# Altium PCB АСТА.758725.047_V2.PcbDoc (part 1 of 3)
Units mm, origin at the board's own origin, x right, y up, seen from the top; angles counter-clockwise.
Board outline 310 x 80 mm, 2 copper layers (Top Layer, Top, Bottom Layer, Bottom); 261 components, 259 nets, 994 pads, 414 vias.
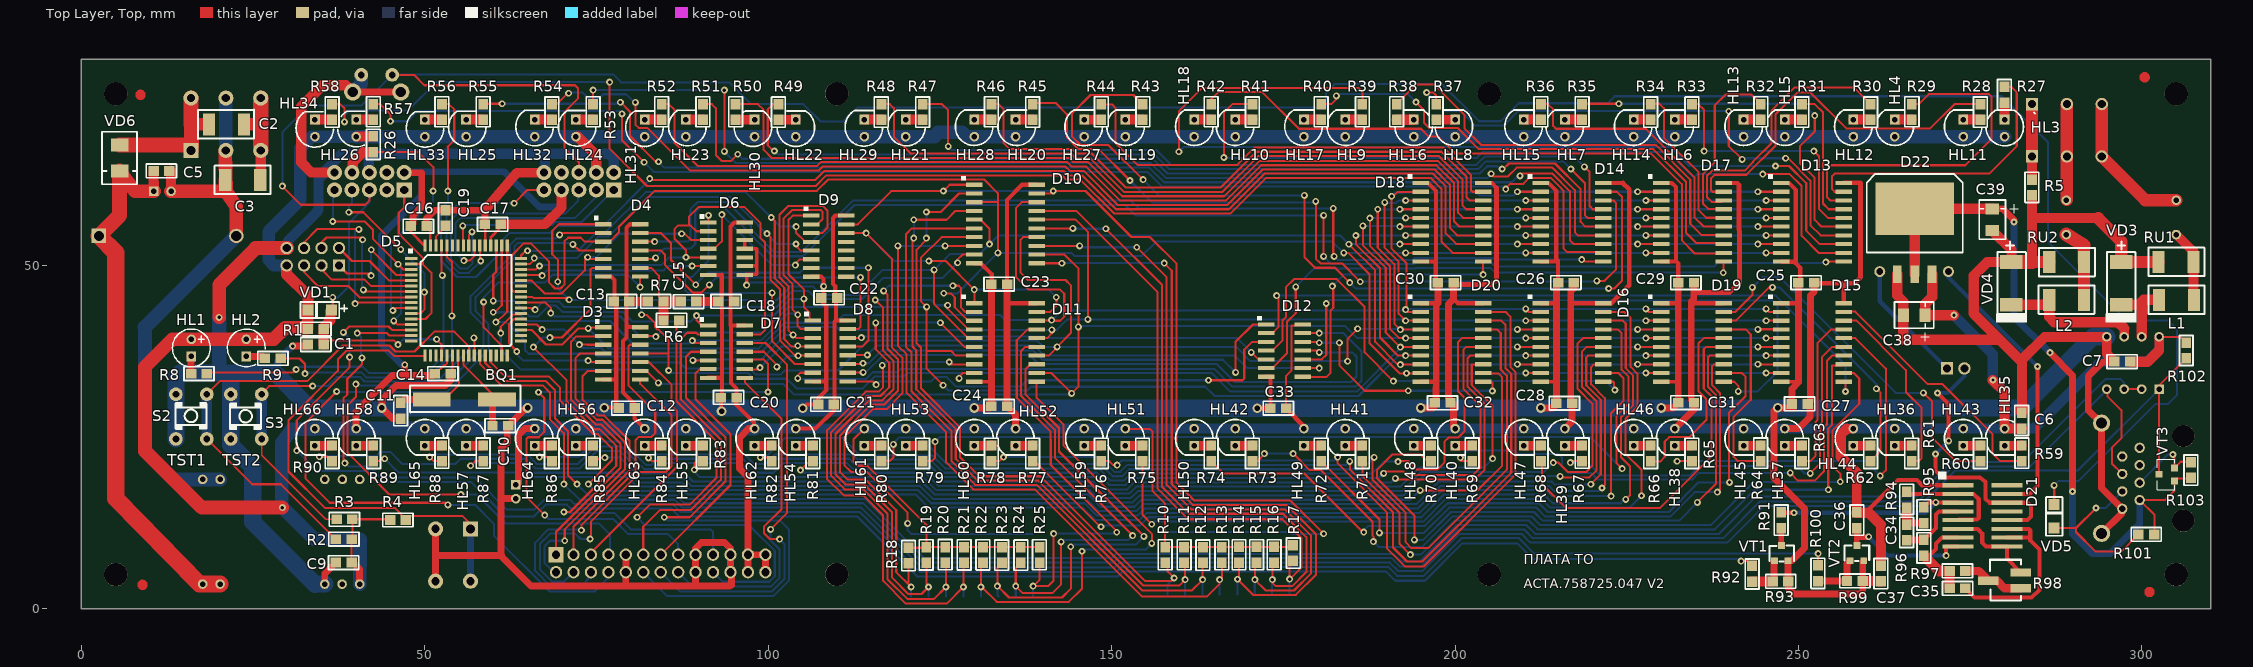
[diagram p0: Top Layer, Top view]
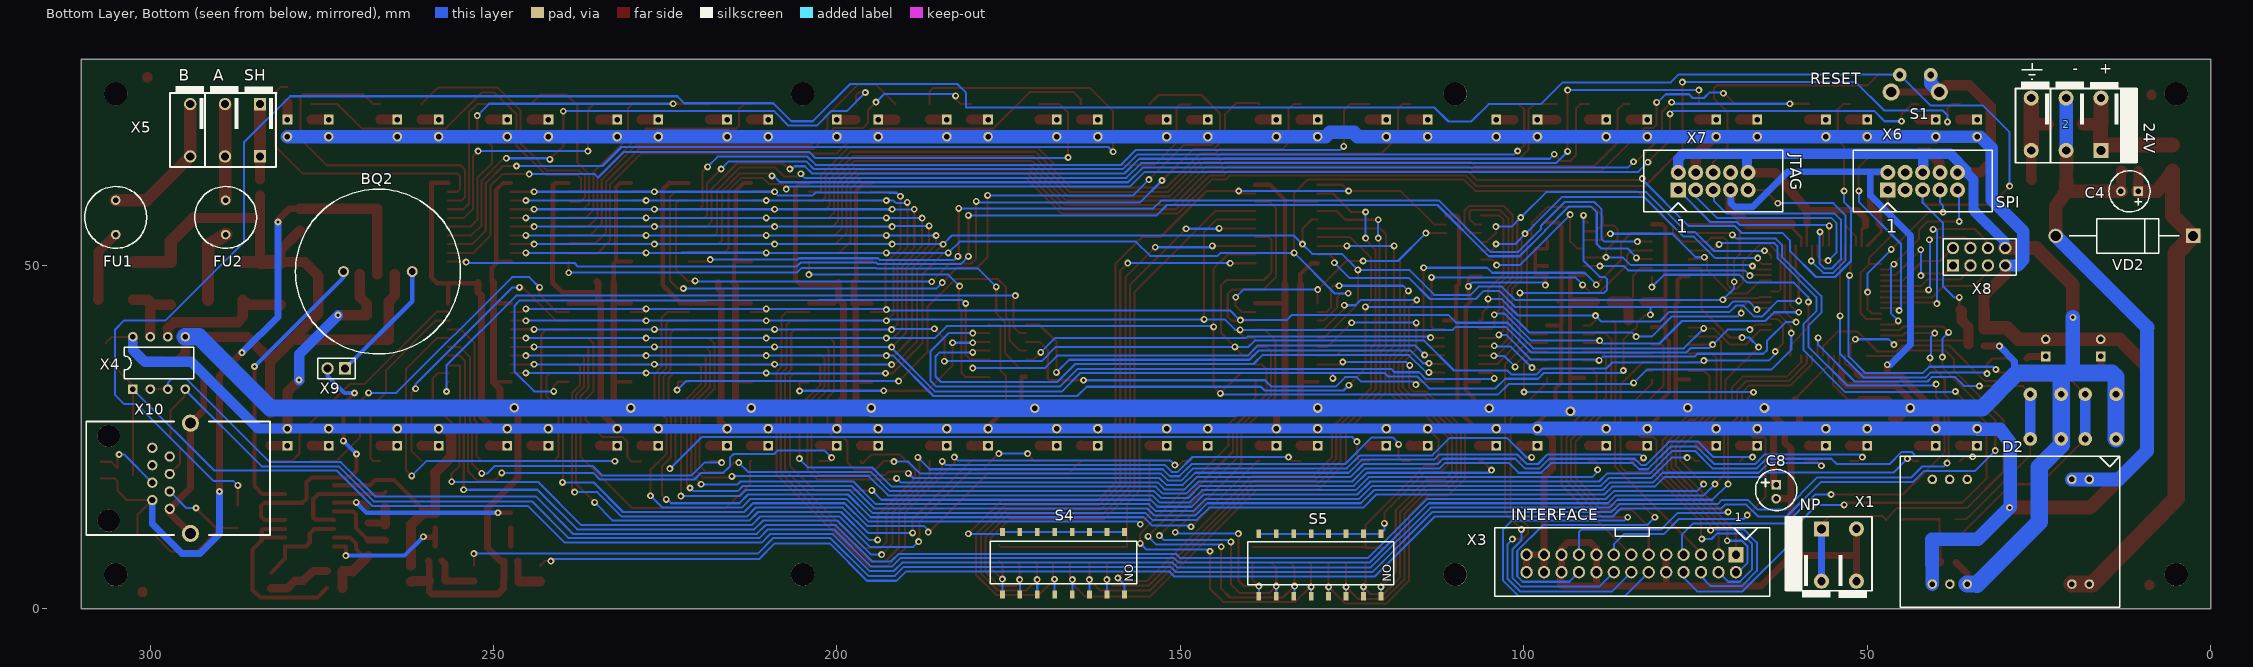
[diagram p1: Bottom Layer, Bottom view, seen from below]

## Layer stack, top to bottom
Top Solder, Top Mask: solder mask 0.0102, Solder Resist, Dk 3.5
Top Layer, Top: signal copper 0.0356
Dielectric 1: dielectric 0.32, FR-4, Dk 4.8
Bottom Layer, Bottom: signal copper 0.0356
Bottom Solder, Bot Mask: solder mask 0.0102, Solder Resist, Dk 3.5

## Board outline
0,0 310,0 310,80 0,80

## Design rules (kind name [scope] priority, off if disabled: settings)
Clearance [All] p1: gap=0.254 ignorepadtopadclearanceinfootprint=FALSE except(0: Arc-Hole Track-Hole SMDPad-Hole THPad-Hole Via-Hole Fill-Hole Poly-Hole Region-Hole Text-Hole; 0.305: Arc-Arc Arc-Track Arc-THPad Arc-Via Track-Track Track-THPad Track-Via THPad-THPad THPad-Via Via-Via)
HoleSize [All] p1: absolutevalues=TRUE maxlimit=6 minlimit=0.3 maxpercent=80.000 minpercent=20.000
MinimumSolderMaskSliver [All] p1: minsoldermaskwidth=0.1
PlaneClearance [All] p1: clearance=0.4
PolygonConnect [All] p1: connectstyle=Relief reliefconductorwidth=0.254 reliefentries=4 polygonreliefangle="90 Angle" airgapwidth=0.254
RoutingCorners [All] p1: cornerstyle=45-Degree minsetback=2.5 maxsetback=2.5
RoutingVias [All] p1: holewidth=0.5 width=1 viastyle="Through Hole" minholewidth=0.4 minwidth=0.8 maxholewidth=0.8 maxwidth=1.6
SilkToSilkClearance [All] p1: silktosilkclearance=0.05
SilkToSolderMaskClearance [IsPad] p1: minsilkscreentomaskgap=0.05 clearancetoexposedcopper=TRUE
SolderMaskExpansion SolderMaskExpansion_1 [isVia] p1: expansion=-0.5
SolderMaskExpansion [All] p2: expansion=0.2
Width [All] p1: maxlimit=4 minlimit=0.2 preferedwidth=0.5
24 further rules are at their usual default settings.

## Components (designator, comment, footprint, x,y, rotation, side; value= is the part's Value field where it differs from the comment)
2 "{Value}" DG142V_03_ПРЯМАЯ 15.95,66.75 r0 bottom
BQ1 "" HC49 60.5,30.5 r180 top
BQ2 "" KPE112 261.836,49.111 r0 bottom
C1 "" 0805 35.25,38.5 r180 top
C2 "" 1812 23.65,70.55 r180 top
C3 "" 1812 20.95,62.45 r0 top
C4 "" CE-H2.5_D6_D0.8 10.55,60.8 r0 bottom
C5 "" 0805 10.5,63.75 r0 top
C6 "" 0805 282.5,26.25 r90 top
C7 "" 0805 296,36 r0 top
C8 "" CE-H2_D6_D0.8 63.25,18.05 r270 bottom
C9 "" 0805 37.05,6.75 r0 top
C10 "" 0805 59.85,26.65 r0 top
C11 "" 0805 46.5,30 r270 top
C12 "" 0805 78.25,29.25 r0 top
C13 "" 0805 77.5,44.75 r0 top
C14 "" 0805 53.75,34.25 r180 top
C15 "" 0805 87.25,44.75 r0 top
C16 "" 0805 50.25,55.75 r180 top
C17 "" 0805 58.75,56 r0 top
C18 "" 0805 92.75,44.75 r0 top
C19 "" 0805 53,55.75 r90 top
C20 "" 0805 93.1,30.75 r0 top
C21 "" 0805 107.25,29.75 r0 top
C22 "" 0805 107.75,45.25 r0 top
C23 "" 0805 132.5,47.25 r0 top
C24 "" 0805 132.5,29.5 r0 top
C25 "" 0805 250,47.5 r0 top
C26 "" 0805 215,47.5 r0 top
C27 "" 0805 249.05,29.85 r0 top
C28 "" 0805 214.75,29.95 r0 top
C29 "" 0805 232.5,47.5 r0 top
C30 "" 0805 197.5,47.5 r0 top
C31 "" 0805 232.5,30 r0 top
C32 "" 0805 197.05,30 r0 top
C33 "" 0805 173.117,29.221 r0 top
C34 "" 0805 265.75,12.25 r270 top
C35 "" 0805 272,3 r0 top
C36 "" 0805 258.5,11.75 r90 top
C37 "" 0805 262,4 r90 top
C38 "10 uF 6.3 V" SIZE_A_1206 265.265,42.761 r180 top
C39 "10 uF 6.3 V" SIZE_A_1206 278.219,55.08 r270 top
D2 "" AM4T_AM4T(Primary) 17.65,18.85 r0 bottom
D3 "" SO14 76,41 r270 top
D4 "" SO14 76,56 r270 top
D5 "" QFP14X14-64 48,51 r0 top
D6 "" SO14 91.25,56.25 r270 top
D7 "" SO14 91.25,41.25 r270 top
D8 "" SO16 106.5,42 r270 top
D9 "" SO16 106.25,57.25 r270 top
D10 "" SO20W 130,61.75 r270 top
D11 "" SO20W 130,44.5 r270 top
D12 "" SO14 172.482,41.413 r270 top
D13 "" SO20W 247.5,62 r270 top
D14 "" SO20W 212.5,62 r270 top
D15 "" SO20W 247.5,44.5 r270 top
D16 "" SO20W 212.5,44.5 r270 top
D17 "" SO20W 230,62 r270 top
D18 "" SO20W 195,62 r270 top
D19 "" SO20W 230,44.5 r270 top
D20 "" SO20W 195,44.5 r270 top
D21 "" SO16+W 272.25,18 r270 top
D22 "LM1086" TO-263 264.376,48.73 r270 top
FU1 "" FUSE 305,59.5 r270 bottom
FU2 "" FUSE 289,59.5 r270 bottom
HL1 "" HL_1 16,38 r180 top
HL2 "" HL_1 24,38 r180 top
HL3 "" HL_1 280,70 r0 top
HL4 "" HL_1 264,70 r0 top
HL5 "" HL_1 248,70 r0 top
HL6 "" HL_1 232,70 r0 top
HL7 "" HL_1 216,70 r0 top
HL8 "" HL_1 200,70 r0 top
HL9 "" HL_1 184,70 r0 top
HL10 "" HL_1 168,70 r0 top
HL11 "" HL_1 274,70 r0 top
HL12 "" HL_1 258,70 r0 top
HL13 "" HL_1 242,70 r0 top
HL14 "" HL_1 226,70 r0 top
HL15 "" HL_1 210,70 r0 top
HL16 "" HL_1 194,70 r0 top
HL17 "" HL_1 178,70 r0 top
HL18 "" HL_1 162,70 r0 top
HL19 "" HL_1 152,70 r0 top
HL20 "" HL_1 136,70 r0 top
HL21 "" HL_1 120,70 r0 top
HL22 "" HL_1 104,70 r0 top
HL23 "" HL_1 88,70 r0 top
HL24 "" HL_1 72,70 r0 top
HL25 "" HL_1 56,70 r0 top
HL26 "" HL_1 40,70 r0 top
HL27 "" HL_1 146,70 r0 top
HL28 "" HL_1 130,70 r0 top
HL29 "" HL_1 114,70 r0 top
HL30 "" HL_1 98,70 r0 top
HL31 "" HL_1 82,70 r0 top
HL32 "" HL_1 66,70 r0 top
HL33 "" HL_1 50,70 r0 top
HL34 "" HL_1 34,70 r0 top
HL35 "" HL_1 280,25 r180 top
HL36 "" HL_1 264,25 r180 top
HL37 "" HL_1 248,25 r180 top
HL38 "" HL_1 232,25 r180 top
HL39 "" HL_1 216,25 r180 top
HL40 "" HL_1 200,25 r180 top
HL41 "" HL_1 184,25 r180 top
HL42 "" HL_1 168,25 r180 top
HL43 "" HL_1 274,25 r180 top
HL44 "" HL_1 258,25 r180 top
HL45 "" HL_1 242,25 r180 top
HL46 "" HL_1 226,25 r180 top
HL47 "" HL_1 210,25 r180 top
HL48 "" HL_1 194,25 r180 top
HL49 "" HL_1 178,25 r180 top
HL50 "" HL_1 162,25 r180 top
HL51 "" HL_1 152,25 r180 top
HL52 "" HL_1 136,25 r180 top
HL53 "" HL_1 120,25 r180 top
HL54 "" HL_1 104,25 r180 top
HL55 "" HL_1 88,25 r180 top
HL56 "" HL_1 72,25 r180 top
HL57 "" HL_1 56,25 r180 top
HL58 "" HL_1 40,25 r180 top
HL59 "" HL_1 146,25 r180 top
HL60 "" HL_1 130,25 r180 top
HL61 "" HL_1 114,25 r180 top
HL62 "" HL_1 98,25 r180 top
HL63 "" HL_1 82,25 r180 top
HL64 "" HL_1 66,25 r180 top
HL65 "" HL_1 50,25 r180 top
HL66 "" HL_1 34,25 r180 top
L1 "" 1812 302.5,45 r0 top
L2 "" 1812 286.5,45 r0 top
R1 "" 0805 35.25,40.75 r180 top
R2 "" 0805 37.05,10.15 r0 top
R3 "" 0805 37.15,13.05 r0 top
R4 "" 0805 44.95,12.95 r0 top
R5 "" 0805 284,62.5 r270 top
R6 "" 0805 84.75,42 r0 top
R7 "" 0805 84.75,44.75 r180 top
R8 "" 0805 18.25,34.25 r180 top
R9 "" 0805 29,36.5 r180 top
R10 "" 0805 157.795,6.718 r90 top
R11 "" 0805 160.545,6.718 r90 top
R12 "" 0805 163.295,6.718 r90 top
R13 "" 0805 166.045,6.718 r90 top
R14 "" 0805 168.545,6.742 r90 top
R15 "" 0805 171.085,6.742 r90 top
R16 "" 0805 173.625,6.742 r90 top
R17 "" 0805 176.419,6.996 r90 top
R18 "" 0805 120.412,6.615 r90 top
R19 "" 0805 123.016,6.718 r90 top
R20 "" 0805 125.766,6.718 r90 top
R21 "" 0805 128.516,6.718 r90 top
R22 "" 0805 131.266,6.718 r90 top
R23 "" 0805 134.016,6.718 r90 top
R24 "" 0805 136.766,6.718 r90 top
R25 "" 0805 139.516,6.718 r90 top
R26 "" 0805 42.5,66.5 r90 top
R27 "" 0805 280,76 r270 top
R28 "" 0805 276.5,73.5 r270 top
R29 "" 0805 266.5,73.5 r270 top
R30 "" 0805 260.5,73.5 r270 top
R31 "" 0805 250.5,73.5 r270 top
R32 "" 0805 244.5,73.5 r270 top
R33 "" 0805 234.5,73.5 r270 top
R34 "" 0805 228.5,73.5 r270 top
R35 "" 0805 218.5,73.5 r270 top
R36 "" 0805 212.5,73.5 r270 top
R37 "" 0805 197.25,73.5 r270 top
R38 "" 0805 191.5,73.5 r270 top
R39 "" 0805 186.5,73.5 r270 top
R40 "" 0805 180.5,73.5 r270 top
R41 "" 0805 170.5,73.5 r270 top
R42 "" 0805 164.5,73.5 r270 top
R43 "" 0805 154.5,73.5 r270 top
R44 "" 0805 148.5,73.5 r270 top
R45 "" 0805 138.5,73.5 r270 top
R46 "" 0805 132.5,73.5 r270 top
R47 "" 0805 122.5,73.5 r270 top
R48 "" 0805 116.5,73.5 r270 top
R49 "" 0805 101.5,73.5 r270 top
R50 "" 0805 95.25,73.5 r270 top
R51 "" 0805 90.5,73.5 r270 top
R52 "" 0805 84.5,73.5 r270 top
R53 "" 0805 74.5,73.5 r270 top
R54 "" 0805 68.5,73.5 r270 top
R55 "" 0805 58.5,73.5 r270 top
R56 "" 0805 52.5,73.5 r270 top
R57 "" 0805 42.5,73.5 r270 top
R58 "" 0805 36.5,73.5 r270 top
R59 "" 0805 282.5,21.5 r90 top
R60 "" 0805 276.5,21.5 r90 top
R61 "" 0805 266.5,21.5 r90 top
R62 "" 0805 260.5,21.5 r90 top
R63 "" 0805 250.5,21.5 r90 top
R64 "" 0805 244.5,21.5 r90 top
R65 "" 0805 234.5,21.5 r90 top
R66 "" 0805 228.5,21.5 r90 top
R67 "" 0805 218.5,21.5 r90 top
R68 "" 0805 212.5,21.5 r90 top
R69 "" 0805 202.5,21.5 r90 top
R70 "" 0805 196.5,21.5 r90 top
R71 "" 0805 186.5,21.5 r90 top
R72 "" 0805 180.5,21.5 r90 top
R73 "" 0805 170.5,21.5 r90 top
R74 "" 0805 164.5,21.5 r90 top
R75 "" 0805 154.5,21.5 r90 top
R76 "" 0805 148.5,21.5 r90 top
R77 "" 0805 138.5,21.5 r90 top
R78 "" 0805 132.5,21.5 r90 top
R79 "" 0805 122.5,21.5 r90 top
R80 "" 0805 116.5,21.5 r90 top
R81 "" 0805 106.5,21.5 r90 top
R82 "" 0805 100.5,21.5 r90 top
R83 "" 0805 90.5,21.5 r90 top
R84 "" 0805 84.5,21.5 r90 top
R85 "" 0805 74.5,21.5 r90 top
R86 "" 0805 68.5,21.5 r90 top
R87 "" 0805 58.5,21.5 r90 top
R88 "" 0805 52.5,21.5 r90 top
R89 "" 0805 42.5,21.5 r90 top
R90 "" 0805 36.5,21.5 r90 top
R91 "" 0805 247.5,11.75 r90 top
R92 "" 0805 243.25,6.25 r270 top
R93 "" 0805 246.25,4 r0 top
R94 "" 0805 265.75,14.75 r90 top
R95 "" 0805 268.25,12.5 r90 top
R96 "" 0805 268.25,7.75 r90 top
R97 "" 0805 272,5.5 r0 top
R98 "" PVG3G 282.25,3 r90 top
R99 "" 0805 259.35,4.05 r180 top
R100 "" 0805 252.85,4.05 r90 top
R101 "51k" 0805 301.766,10.849 r180 top
R102 "51k" 0805 306.448,38.749 r270 top
R103 "51k" 0805 307.14,19.087 r90 top
RU1 "" 1812 307.5,50.5 r180 top
RU2 "" 1812 286.5,50.5 r0 top
S1 "" S07XX 43,77 r0 bottom
S2 "" S06XX 16,28 r90 top
S3 "" S06XX 24,28 r90 top
S4 "" DM8 158.131,11.187 r0 bottom
S5 "" DM8 120.793,10.933 r0 bottom
VD1 "" 1206 33,43.5 r0 top
VD2 "" VD-H20_D5_D1.5 2.55,54.3 r0 bottom
VD3 "" SMC 297,50.5 r270 top
VD4 "" SMC 281,50.5 r270 top
VD5 "" 1206 287.213,15.184 r270 top
VD6 "10BQ060" SMB 5.55,67.55 r180 top
VT1 "" SOT23#1 246.5,7 r0 top
VT2 "" SOT23#1 257.5,7 r0 top
VT3 "27002" SOT23#2 304.762,18.631 r90 top
X1 "{Value}" DG142V_02_ПРЯМАЯ 56.65,11.65 r180 bottom
X3 "" BH26 69.104,7.885 r0 bottom
X4 "" DIP8 302.5,32 r180 bottom
X5 "" DG142V-03_01 284,73.5 r0 bottom
X6 "" BH10 47,61 r180 bottom
X7 "" BH10 77.5,61 r180 bottom
X8 "" PLD8 37.5,50 r180 bottom
X9 "" PLS2 271.615,35.014 r0 bottom
X10 "XPort" XPORT 297.142,14.567 r180 bottom

## Footprints (in the part's own frame and the unit in brackets; to place one, negate y for a bottom-side part, rotate by r counter-clockwise, add the part's x,y. Pads: shape width x height; smd on the part's side, far side on the other; paste and mask are expansions set on the pad)
0805 [mil]
  rect 60x56 smd: 1(0,0) 2(90,0)
1206 [mil]
  rect 64x64 smd: 1(0,0) 2(134,0)
1812 [mil]
  rect 70x126 smd: 1(0,0) 2(200,0)
AM4T_AM4T(Primary) [mm]
  round 1.4 hole 0.8: 2(0,0) 3(2.54,0) 9(17.78,0) 11(22.86,0) 14(22.86,15.24) 16(17.78,15.24) 22(2.54,15.24) 23(0,15.24)
  silkscreen extent -4.44,-3.38 27.56,18.62
BH10 [mm]
  rect 2.2x2.2 hole 1.2: 1(0,0)
  round 2.2 hole 1.2: 2(0,2.54) 3(2.54,0) 4(2.54,2.54) 5(5.08,0) 6(5.08,2.54) 7(7.62,0) 8(7.62,2.54) 9(10.16,0) 10(10.16,2.54)
  silkscreen extent -5,-3.2 15.2,5.8
BH26 [mm]
  rect 2.2x2.2 hole 1.2: 1(0,0)
  round 1.8 hole 1.2: 2(0,2.54) 3(2.54,0) 4(2.54,2.54) 5(5.08,0) 6(5.08,2.54) 7(7.62,0) 8(7.62,2.54) 9(10.16,0) 10(10.16,2.54) 11(12.7,0) 12(12.7,2.54) 13(15.24,0) 14(15.24,2.54) 15(17.78,0) 16(17.78,2.54) 17(20.32,0) 18(20.32,2.54) 19(22.86,0) 20(22.86,2.54) 21(25.4,0) 22(25.4,2.54) 23(27.94,0) 24(27.94,2.54) 25(30.48,0) 26(30.48,2.54)
CE-H2.5_D6_D0.8 [mm]
  rect 1.4x1.4 hole 0.8: 1(0,0)
  round 1.4 hole 0.8: 2(2.5,0)
  silkscreen extent -1.75,-3 4.25,3
CE-H2_D6_D0.8 [mm]
  rect 1.4x1.4 hole 0.8: 1(0,0)
  round 1.4 hole 0.8: 2(2,0)
  silkscreen extent -2.25,-3 3.75,3
DG142V-03_01 [mm]
  rect 1.8x1.8 hole 1.2: 1(0,0) 4(0,7.62)
  round 1.8 hole 1.2: 2(5.08,0) 3(10.16,0) 5(5.08,7.62) 6(10.16,7.62)
DG142V_02_ПРЯМАЯ [mm]
  rect 2.2x2.2 hole 1.3: 1(0,0)
  round 2.2 hole 1.2: 2(5.08,0) 3(5.08,-7.62) 4(0,-7.62)
  silkscreen extent -5.33,-9.02 7.37,1.78
DG142V_03_ПРЯМАЯ [mm]
  rect 2.2x2.2 hole 1.3: 1(0,0)
  round 2.2 hole 1.2: 2(5.08,0) 3(10.16,0) 4(10.16,-7.62) 5(5.08,-7.62) 6(0,-7.62)
  silkscreen extent -5.33,-9.02 12.45,1.78
DIP8 [mm]
  rect 1.4x1.4 hole 0.8: 1(0,0)
  round 1.4 hole 0.8: 2(2.54,0) 3(5.08,0) 4(7.62,0) 5(7.62,7.62) 6(5.08,7.62) 7(2.54,7.62) 8(0,7.62)
  silkscreen extent -1.27,1.52 8.89,6.1
DM8 [mm]
  rect 0.7x1.2 smd: 1(0,0) 2(2.54,0) 3(5.08,0) 4(7.62,0) 5(10.16,0) 6(12.7,0) 7(15.24,0) 8(17.78,0) 9(17.78,9.09) 10(15.24,9.09) 11(12.7,9.09) 12(10.16,9.09) 13(7.62,9.09) 14(5.08,9.09) 15(2.54,9.09) 16(0,9.09)
FUSE [mm]
  round 1.4 hole 0.8: 1(0,0) 2(5,0)
  silkscreen extent -2,-4.5 7,4.5
HC49 [mm]
  rect 5.5x2 smd: 1(0,0) 2(9.5,0)
HL_1 [mm]
  round 1.4 hole 0.8: 1(0,-1.25)
  rect 1.4x1.4 hole 0.8: 2(0,1.25)
  silkscreen extent -2.75,-2.75 2.75,2.75
KPE112 [mm]
  round 1.6 hole 1: 1(0,0) 2(10,0)
  silkscreen extent -7,-12 17,12
PLD8 [mm]
  rect 1.8x1.8 hole 1.2: 1(0,0)
  round 1.8 hole 1.2: 2(0,2.54) 3(2.54,0) 4(2.54,2.54) 5(5.08,0) 6(5.08,2.54) 7(7.62,0) 8(7.62,2.54)
  silkscreen extent -1.4,-1.4 9.2,3.9
PLS2 [mm]
  rect 1.8x1.8 hole 1.2: 1(0,0)
  round 1.8 hole 1.2: 2(2.54,0)
  silkscreen extent -1.5,-1.5 4,1.5
PVG3G [mm]
  rect 1.2x3 smd: 1(0,-0.1) 2(1.1,4.6) 3(2.3,-0.1)
QFP14X14-64 [mm]
  rect 1.8x0.45 smd: 1(0,0) 2(0,-0.8) 3(0,-1.6) 4(0,-2.4) 5(0,-3.2) 6(0,-4) 7(0,-4.8) 8(0,-5.6) 9(0,-6.4) 10(0,-7.2) 11(0,-8) 12(0,-8.8) 13(0,-9.6) 14(0,-10.4) 15(0,-11.2) 16(0,-12) 33(16,-12) 34(16,-11.2) 35(16,-10.4) 36(16,-9.6) 37(16,-8.8) 38(16,-8) 39(16,-7.2) 40(16,-6.4) 41(16,-5.6) 42(16,-4.8) 43(16,-4) 44(16,-3.2) 45(16,-2.4) 46(16,-1.6) 47(16,-0.8) 48(16,0)
  rect 0.45x1.8 smd: 17(2,-14.1) 18(2.8,-14.1) 19(3.6,-14.1) 20(4.4,-14.1) 21(5.2,-14.1) 22(6,-14.1) 23(6.8,-14.1) 24(7.6,-14.1) 25(8.4,-14.1) 26(9.2,-14.1) 27(10,-14.1) 28(10.8,-14.1) 29(11.6,-14.1) 30(12.4,-14.1) 31(13.2,-14.1) 32(14,-14.1) 49(14,1.9) 50(13.2,1.9) 51(12.4,1.9) 52(11.6,1.9) 53(10.8,1.9) 54(10,1.9) 55(9.2,1.9) 56(8.4,1.9) 57(7.6,1.9) 58(6.8,1.9) 59(6,1.9) 60(5.2,1.9) 61(4.4,1.9) 62(3.6,1.9) 63(2.8,1.9) 64(2,1.9)
  silkscreen extent -0.41,0.78 0.23,1.42
S06XX [mm]
  round 2 hole 1: 1(-3.25,-2.25) 2(3.25,-2.25) 3(3.25,2.25) 4(-3.25,2.25)
S07XX [mm]
  round 2 hole 1: 1(-2.25,-0.75) 2(2.25,-0.75)
  round 2.5 hole 1.5: 3(3.5,1.75) 4(-3.5,1.75)
SIZE_A_1206 [mm]
  rect 1.6x2 smd: 1(0,0) 2(-3.175,0)
  silkscreen extent -4.44,-1.91 1.27,3.81
SMB [mm]
  rect 2.54x1.905 smd: 1(0,0) 2(0,3.81)
  silkscreen extent -2.54,-1.91 2.54,5.71
SMC [mm]
  rect 2x3.3 smd: 1(0,0) 2(6.2,0)
SO14 [mm]
  rect 0.6x2.4 smd: 1(0,0) 2(1.27,0) 3(2.54,0) 4(3.81,0) 5(5.08,0) 6(6.35,0) 7(7.62,0) 8(7.62,5.338) 9(6.35,5.338) 10(5.08,5.338) 11(3.81,5.338) 12(2.54,5.338) 13(1.27,5.338) 14(0,5.338)
  silkscreen extent -1.17,-1.2 -0.54,-0.57
SO16 [mm]
  rect 0.6x2.4 smd: 1(0,0) 2(1.27,0) 3(2.54,0) 4(3.81,0) 5(5.08,0) 6(6.35,0) 7(7.62,0) 8(8.89,0) 9(8.89,5.088) 10(7.62,5.088) 11(6.35,5.088) 12(5.08,5.088) 13(3.81,5.088) 14(2.54,5.088) 15(1.27,5.088) 16(0,5.088)
  silkscreen extent -1.27,-1.25 -0.63,-0.62
SO16+W [mm]
  rect 0.6x4.5 smd: 1(0,1) 2(1.27,1) 3(2.54,1) 4(3.81,1) 5(5.08,1) 6(6.35,1) 7(7.62,1) 8(8.89,1) 9(8.89,8.088) 10(7.62,8.088) 11(6.35,8.088) 12(5.08,8.088) 13(3.81,8.088) 14(2.54,8.088) 15(1.27,8.088) 16(0,8.088)
SO20W [mm]
  rect 0.6x2.4 smd: 1(0,0) 2(1.27,0) 3(2.54,0) 4(3.81,0) 5(5.08,0) 6(6.35,0) 7(7.62,0) 8(8.89,0) 9(10.16,0) 10(11.43,0) 11(11.43,9.088) 12(10.16,9.088) 13(8.89,9.088) 14(7.62,9.088) 15(6.35,9.088) 16(5.08,9.088) 17(3.81,9.088) 18(2.54,9.088) 19(1.27,9.088) 20(0,9.088)
  silkscreen extent -1.27,-1.91 -0.63,-1.27
SOT23#1 [mm]
  rect 1x1 smd: 1(0,0) 2(2,0) 3(1.016,2.21)
SOT23#2 [mm]
  rect 1x1 smd: 1(0,0) 2(1.905,0) 3(0.973,2.251)
  silkscreen extent -1.27,0 3.17,2.54
TO-263 [mm]
  rect 2.54x1.27 smd: 1(0,0) 2(0,2.54) 3(0,5.08)
  rect 7.62x11.43 smd: 4(-9.525,2.54)
  silkscreen extent -14.61,-4.45 -3.17,9.53
VD-H20_D5_D1.5 [mm]
  rect 2.1x2.1 hole 1.5: 1(0,0)
  round 2.1 hole 1.5: 2(20,0)
  silkscreen extent 2,-2.5 18,2.5
XPORT [mm]
  round 1.5 hole 0.9: 1(0,0) 2(-2.54,1.27) 3(0,2.54) 4(-2.54,3.81) 5(0,5.08) 6(-2.54,6.35) 7(0,7.62) 8(-2.54,8.89)
  round 3.25 hole 3.25 unplated: 9(-8.89,-1.705) 10(-8.89,10.595)
  round 2.5 hole 1.6: 11(3.01,-3.58) 12(3.01,12.47)
  silkscreen extent -12.16,-3.81 14.61,12.7

## Free pads (board coordinates)
  round 3.4 hole 3.4 unplated: 0(5,5) 0(5,75) 0(110,5) 0(110,75) 0(205,5) 0(205,75) 0(305,5) 0(305,75)
  round 1.4 hole 0.8: 4(37.95,3.6) 4(38,18.85)

## Via types
v1: diameter 1, hole 0.5, Top Layer, Top to Bottom Layer, Bottom, 391 vias
v2: diameter 1.016, hole 0.457, Top Layer, Top to Bottom Layer, Bottom, 12 vias
v3: diameter 1.4, hole 0.8, Top Layer, Top to Bottom Layer, Bottom, 11 vias

## Nets (pads, with @x,y where several pads share a name; then routed paths per layer and width w, separated by ;. In a path a pad name is that pad's centre, name@x,y a point inside that pad or via, vN(x,y) a via of type N, cw(c..) or ccw(c..) an arc to the next point about the centre after c; other vN are vias at no path point)
+3.3V: C39.2 D22.2 D22.4 R101.1 R103.1 VT3.1 X10.2 | length 105.9
  Top Layer, Top w0.3: R101.1@301.766,10.849 301.841,10.757 301.841,13.678 X10.2@299.682,15.837 303.365,15.837 304.762,17.234 VT3.1@304.762,18.631 305.143,19.012 307.175,19.012 R103.1@307.14,19.087
  Top Layer, Top w1: C39.2@278.219,58.255 279.745,58.255 281.394,56.606 v2(281.394,56.35) ; v2(286.601,37.3) 289.903,33.998 v2(289.903,17.107)
  Top Layer, Top w1.5: D22.2@266.916,48.73 D22.4@266.916,58.255 C39.2@278.219,58.255
  Bottom Layer, Bottom w1: v2(281.394,56.35) 281.394,42.507 v2(286.601,37.3) ; v2(289.903,17.107) 289.903,10.897 292.71,8.09 295.39,8.09 299.682,12.382 X10.2@299.682,15.837
+5V: C6.1 C7.2 C8.1 C9.2 C12.2 C13.2 C14.2 C16.2 C17.2 C18.2 C20.2 C21.2 C22.2 C23.2 C24.2 C25.2 C26.2 C27.2 C28.2 C29.2 C30.2 C31.2 C32.2 C33.2 C36.2 C37.2 C38.2 D2.14 D3.14 D4.14 D5.21 D5.52 D5.64 D6.14 D7.14 D8.16 D9.16 D10.20 D11.20 D12.14 D13.20 D14.20 D15.20 D16.20 D17.20 D18.20 D19.20 D20.20 D21.1 D22.3 HL1.1 HL2.1 HL3.1 HL4.1 HL5.1 HL6.1 HL7.1 HL8.1 HL9.1 HL10.1 HL11.1 HL12.1 HL13.1 HL14.1 HL15.1 HL16.1 HL17.1 HL18.1 HL19.1 HL20.1 HL21.1 HL22.1 HL23.1 HL24.1 HL25.1 HL26.1 HL27.1 HL28.1 HL29.1 HL30.1 HL31.1 HL32.1 HL33.1 HL34.1 HL35.1 HL36.1 HL37.1 HL38.1 HL39.1 HL40.1 HL41.1 HL42.1 HL43.1 HL44.1 HL45.1 HL46.1 HL47.1 HL48.1 HL49.1 HL50.1 HL51.1 HL52.1 HL53.1 HL54.1 HL55.1 HL56.1 HL57.1 HL58.1 HL59.1 HL60.1 HL61.1 HL62.1 HL63.1 HL64.1 HL65.1 HL66.1 R1.2 R2.2 R3.2 R4.1 R7.2 R10.2 R11.2 R12.2 R13.2 R14.2 R15.2 R16.2 R17.2 R18.2 R19.2 R20.2 R21.2 R22.2 R23.2 R24.2 R25.2 R26.2 R102.1 VD1.1 X3.23 X3.24 X3.25 X3.26 X4.8 X6.2 X7.4 X7.7 X8.7 | length 1376.7
  Top Layer, Top w0.3: C9.2@39.336,6.936 R2.2@39.336,10.15 39.436,10.25 R3.2@39.436,13.05 44.85,13.05 R4.1@44.95,12.95 ; C14.2@51.464,34.25 51.54,34.25 52.79,35.5 53,35.5 53.2,35.7 D5.21@53.2,36.9 ; HL61.1@114,26.25 112.419,24.669 112.419,21.519 113.1,20.839 114.443,20.839 123.016,12.266 R19.2@123.016,9.004 ; R18.2@120.412,8.901 122.913,8.901 R19.2@123.016,9.004 ; R25.2@139.516,9.004 R24.2@136.766,9.004 R23.2@134.016,9.004 R22.2@131.266,9.004 R21.2@128.516,9.004 R20.2@125.766,9.004 R19.2@123.016,9.004 ; HL51.1@152,26.25 152.077,26.173 155.591,26.173 155.972,25.792 155.972,17.15 157.795,15.327 R10.2@157.795,9.004 R11.2@160.545,9.004 R12.2@163.295,9.004 R13.2@166.045,9.004 168.521,9.004 R14.2@168.545,9.028 R15.2@171.085,9.028 R16.2@173.625,9.028 176.165,9.028 R17.2@176.419,9.282 ; C33.2@175.403,29.221 175.403,33.92 176.165,34.682 176.165,41.286 177.693,41.286 D12.14@177.82,41.413 ; 216.92,46.37 217.32,46.37 217.32,46.702 217.286,46.736 ; X4.8@302.534,39.586 305.611,39.586 R102.1@306.448,38.749
  Top Layer, Top w0.4: C16.2@47.964,55.75 47.964,54.846 49.91,52.9 D5.64@50,52.9 ; D5.52@59.6,52.9 59.6,54.1 61.036,55.536 C17.2@61.036,56
  Top Layer, Top w0.6: C13.2@79.786,44.75 C13.2@79.686,44.65 ; D3.14@81.338,41 81.288,41.05 79.35,41.05 ; D4.14@81.338,56 79.85,56 79.35,55.5 79.35,44.65 C13.2@79.686,44.65 ; HL63.1@82,26.25 80.536,27.714 C12.2@80.536,29.25 80.536,29.854 78.87,31.52 78.87,39.03 79.35,39.51 79.35,41.05 ; C18.2@95.036,44.75 C18.2@94.5,44.75 ; D7.14@96.588,41.25 94.5,41.25 ; D6.14@96.588,56.25 95.05,56.25 94.5,55.7 C18.2@94.5,44.75 ; HL62.1@98,26.25 97.95,27.15 95.336,29.764 95.336,30.7 C20.2@95.386,30.75 95.386,32.064 94.55,32.9 94.55,41.2 94.5,41.25 ; HL54.1@104,26.25 106.9,26.25 109.536,28.886 C21.2@109.536,29.75 109.536,30.022 109.65,30.136 109.65,41.8 109.85,42 ; D9.16@111.338,57.25 109.75,57.25 109.43,56.93 109.43,47.32 109.75,47 109.75,45.536 C22.2@110.036,45.25 109.85,45.064 109.85,42 ; D8.16@111.588,42 109.85,42 ; 134.75,44.25 135,44.5 D11.20@139.088,44.5 ; C23.2@134.786,47.25 134.75,47.286 134.75,59.54 136.96,61.75 D10.20@139.088,61.75 ; 199.786,45.11 200.396,44.5 D20.20@204.088,44.5 ; D18.20@204.088,62 205.36,62 206.05,61.31 ; 217,44.5 D16.20@221.588,44.5 222.76,44.5 222.81,44.55 ; D14.20@221.588,62 224.43,62 ; 234.48,44.5 D19.20@239.088,44.5 ; D17.20@239.088,62 241.1,62 241.35,61.75 ; C25.2@252.286,47.5 C25.2@252.374,47.412 ; D15.20@256.588,44.5 256.588,47.412 ; D13.20@256.588,62 256.638,62.05 259.05,62.05 ; 259.75,14 264.5,18.75 267.25,18.75 268,18 D21.1@273.25,18 ; 79.35,41.05 79.35,44.314 C13.2@79.686,44.65 ; 94.5,41.25 C18.2@94.5,44.75
  Top Layer, Top w0.7: C33.2@175.403,29.221 178,26.624 HL49.1@178,26.25 ; C30.2@199.786,47.5 200.036,47.25 205.35,47.25 206.05,47.95 206.05,61.31 ; 216.85,44.65 217,44.5 ; 222.81,44.55 225.35,47.09 225.35,61.08 224.43,62 ; 234.75,46.05 239.95,46.05 241.41,47.51 241.41,48.41 241.35,61.75 ; C25.2@252.374,47.412 256.588,47.412 258.162,47.412 259.05,48.3 259.05,62.05
  Top Layer, Top w1: C9.2@39.336,6.75 39.336,6.936 39.35,6.95 40.51,5.79 D2.14@40.51,3.61 ; HL58.1@40,26.25 40,28.75 45.25,34 47.08,34 ; X6.2@47,63.54 47,63.5 49.5,63.5 49.55,63.45 49.55,58.55 48.25,57.25 48.25,56.036 C16.2@47.964,55.75 ; v1(47.08,35.55) 47.08,34 ; C14.2@51.464,34.25 51.214,34 47.08,34 ; C8.1@63.25,18.05 63.45,18.25 63.65,18.25 63.65,25.35 64.55,26.25 HL64.1@66,26.25 ; X3.24@97.044,5.345 X3.23@97.044,7.885 ; HL62.1@98,26.25 97.15,26.25 95.8,24.9 95.8,20.444 97.044,19.2 X3.23@97.044,7.885 ; X3.26@99.584,5.345 X3.25@99.584,7.885 X3.23@97.044,7.885 ; 134.75,44.25 134.75,29.536 C24.2@134.786,29.5 136,28.286 HL52.1@136,26.25 ; C32.2@199.336,30 C32.2@199.572,30 ; C30.2@199.786,47.5 199.786,45.11 199.07,44.394 199.07,30.67 199.74,30 C32.2@199.572,30 ; HL40.1@200,26.25 199.75,26.5 199.75,29.75 199.786,29.786 C32.2@199.572,30 ; C28.2@217.036,29.95 217.036,30.25 216.85,30.436 216.85,44.65 216.85,46.3 216.92,46.37 217.286,46.736 C26.2@217.286,47.5 ; HL38.1@232,26.25 232,26.264 234.786,29.05 C31.2@234.786,30 234.39,30.396 234.39,44.59 ; 234.48,44.5 234.39,44.59 ; C29.2@234.966,47.68 C29.2@234.786,47.5 234.75,47.464 234.75,46.05 234.75,45.11 234.45,44.75 234.45,44.65 234.39,44.59 ; HL37.1@248,26.25 250,26.25 251.675,27.925 251.675,29.511 C27.2@251.336,29.85 251.75,30.264 251.75,45.614 252.286,46.15 C25.2@252.286,47.5 C25.2@252.336,47.45 ; X4.8@302.5,39.62 X4.8@302.534,39.586
  Top Layer, Top w1.016: 134.75,44.25 134.75,47.214 C23.2@134.786,47.25 ; HL39.1@216,26.25 217.036,27.286 C28.2@217.036,29.95
  Top Layer, Top w1.3: C13.2@79.786,44.75 R7.2@82.464,44.75
  Top Layer, Top w1.4: HL26.1@40,68.75 HL26.1@40.036,68.786 ; HL24.1@72,68.75 HL24.1@72.25,68.75 ; 257,26.25 HL44.1@258,26.25 ; 302.5,37.674 X4.8@302.5,39.62
  Top Layer, Top w1.422: R1.2@32.75,40.95 32.764,40.95 R1.2@32.964,40.75 ; HL26.1@40.036,68.786 R26.2@42.5,68.786 ; C17.2@61.036,56 67.5,56 69.95,58.45 69.88,58.52 X7.7@69.88,61 ; C36.2@258.5,14 C36.2@258.5,14.036 258.5,19.81 ; C37.2@262,6.286 262,12.25
  Top Layer, Top w1.5: HL24.1@72.25,68.75 74.96,66.04 X7.4@74.96,63.54 ; 257,26.25 256.15,25.4 256.15,22.16 258.5,19.81 ; C36.2@258.5,14 259.75,14 260.25,14 262,12.25 ; D22.3@269.456,48.73 269.456,45.456 268.44,44.44 C38.2@268.44,42.761 v2(272.631,42.761) ; v2(278.3,33.3) 279.997,31.603 HL35.1@279.997,26.251 ; HL35.1@280,26.25 C6.1@282.5,26.25 ; C7.2@298.286,36 300.826,36 ; 300.825,35.999 302.5,37.674
  Top Layer, Top w1.626: X8.7@29.88,50 29.88,48.72 33,45.6 VD1.1@33,43.5 32.964,43.464 R1.2@32.964,40.75
  Top Layer, Top w2: v1(29.25,14.75) 17.5,14.75 9.25,23 9.25,35.25 13.25,39.25 HL1.1@16,39.25 HL2.1@24,39.25 27.99,39.25 29.69,40.95 R1.2@32.75,40.95
  Bottom Layer, Bottom w1: X6.2@47,63.54 47.098,63.638 48.95,63.638 ; v1(47.08,35.55) 46.61,35.55 43.7,38.46 43.7,54.35 49.546,60.196 49.546,63.638 ; X7.7@69.88,61 69.866,60.986 69.866,59.116 69.26,58.51 66.68,58.51 61.537,63.653 53.743,63.653 ; 48.95,63.638 48.965,63.653 53.743,63.653 ; 48.95,63.638 49.546,63.638 ; 49.546,63.638 53.743,63.653
  Bottom Layer, Bottom w1.4: HL39.1@216,26.25 HL46.1@226,26.25 ; 302.5,37.75 X4.8@302.5,39.62
  Bottom Layer, Bottom w1.5: HL62.1@98,26.25 HL54.1@104,26.25 HL61.1@114,26.25 HL53.1@120,26.25 HL60.1@130,26.25 HL52.1@136,26.25 HL59.1@146,26.25 HL51.1@152,26.25 HL50.1@162,26.25 HL42.1@168,26.25 HL49.1@178,26.25 HL41.1@184,26.25 HL48.1@194,26.25 HL40.1@200,26.25 HL47.1@210,26.25 HL39.1@216,26.25 ; HL7.1@216,68.75 HL7.1@216,68.79 ; HL46.1@226,26.25 HL38.1@232,26.25 HL45.1@242,26.25 HL37.1@248,26.25 HL44.1@258,26.25 HL36.1@264,26.25 HL43.1@274,26.25 HL35.1@280,26.25 284.25,26.25 294,36 300.75,36 302.5,37.75 ; HL14.1@226,68.75 HL14.1@226,68.79 ; v2(272.631,42.761) 278.3,37.092 v2(278.3,33.3)
  Bottom Layer, Bottom w1.8: X8.7@29.88,50 28,50 27.25,50.85 27.25,54.95 31.85,59.55 31.85,67.05 33.55,68.75 HL34.1@34,68.75 HL26.1@40,68.75
  Bottom Layer, Bottom w2: HL26.1@40,68.75 HL33.1@50,68.75 HL25.1@56,68.75 HL32.1@66,68.75 HL24.1@72,68.75 HL31.1@82,68.75 HL23.1@88,68.75 HL30.1@98,68.75 HL22.1@104,68.75 HL29.1@114,68.75 HL21.1@120,68.75 124.19,68.75 124.66,69.22 124.66,69.4 128.22,69.4 128.87,68.75 HL28.1@130,68.75 HL20.1@136,68.75 HL27.1@146,68.75 HL19.1@152,68.75 HL18.1@162,68.75 HL10.1@168,68.75 HL17.1@178,68.75 HL9.1@184,68.75 HL16.1@194,68.75 HL8.1@200,68.75 HL15.1@210,68.75 HL7.1@216,68.75 ; D2.14@40.51,3.61 40.51,6.39 40.55,6.43 40.55,10.15 33.85,10.15 v1(29.25,14.75) 29.15,14.85 29.15,24.15 30.65,26.15 33.7,26.15 33.8,26.25 33.9,26.15 HL66.1@34,26.25 HL58.1@40,26.25 HL65.1@50,26.25 HL57.1@56,26.25 HL64.1@66,26.25 HL56.1@72,26.25 HL63.1@82,26.25 HL55.1@88,26.25 HL62.1@98,26.25 ; HL7.1@216,68.79 HL14.1@226,68.79 ; HL14.1@226,68.75 HL6.1@232,68.75 HL13.1@242,68.75 HL5.1@248,68.75 HL12.1@258,68.75 HL4.1@264,68.75 HL11.1@274,68.75 HL3.1@280,68.75
_SS: D5.10 R26.1 X6.8 | length 41.3
  Top Layer, Top w0.3: 39.5,65 39.5,65.22 ; R26.1@42.5,66.5 49.06,66.5 51.242,64.318 51.242,60.889 v1(51.197,60.844) ; v1(45.355,43.445) 45.71,43.8 D5.10@48,43.8
  Top Layer, Top w1.422: 41,66.5 R26.1@42.5,66.5
  Top Layer, Top w1.5: X6.8@39.38,63.54 39.5,63.66 39.5,65 41,66.5
  Bottom Layer, Bottom w0.3: v1(45.355,43.445) 45.073,43.727 45.073,53.133 51.197,59.257 v1(51.197,60.844)
A0: D5.51 D7.1 D8.1 D9.1 | length 80.1
  Top Layer, Top w0.3: v1(59.96,44.842) 59.96,48.61 60.4,49.05 D5.51@60.4,52.9 ; v1(89.55,42.71) 89.55,42.05 90.35,41.25 D7.1@91.25,41.25 ; D9.1@106.25,57.25 103.55,57.25 102.95,56.65 102.95,48.75 105.19,46.51 v1(105.19,45.14) 105.19,43.96 105.98,43.17 105.98,42 D8.1@106.5,42
  Bottom Layer, Bottom w0.3: v1(59.96,44.842) 63.018,44.842 65.304,42.556 66.437,42.556 68.041,44.16 69.104,44.16 70.054,43.21 78.86,43.21 80.22,41.85 88.69,41.85 v1(89.55,42.71) 100.83,42.71 103.26,45.14 v1(105.19,45.14)
A1: D5.50 D7.3 D8.2 D9.2 | length 89.3
  Top Layer, Top w0.3: v1(59.96,43.191) 60.201,43.191 61.2,44.19 D5.50@61.2,52.9 ; v1(88.95,39.05) 89.03,39.05 89.23,38.85 89.37,38.71 D7.3@91.25,38.71 ; D9.2@106.25,55.98 107.15,55.98 107.93,56.76 107.93,57.8 107.67,58.06 103.46,58.06 102.25,56.85 102.25,48.55 103.55,47.25 103.55,43.56 v1(104.29,42.82) 104.29,41.21 104.75,40.75 106.48,40.75 D8.2@106.5,40.73
  Bottom Layer, Bottom w0.3: v1(59.96,43.191) 63.549,43.191 64.819,41.921 76.959,41.921 80.24,38.64 88.52,38.64 88.73,38.85 88.93,39.05 v1(88.95,39.05) 98.89,39.05 102.86,43.02 104.29,43.02 v1(104.29,42.82)
A2: D5.49 D7.5 D8.3 D9.3 | length 96.7
  Top Layer, Top w0.3: v1@60.25,41.54 v1@60.35,41.64 ; v1(60.35,41.75) v1@60.35,41.64 ; D5.49@62,52.9 62,43.29 v1@60.35,41.64 ; v1(89.03,36.17) D7.5@91.25,36.17 ; D9.3@106.25,54.71 107.86,54.71 108.63,55.48 108.63,57.96 107.92,58.67 102.95,58.67 101.64,57.36 101.64,48.3 102.94,47 102.94,40.56 v1(103.61,39.89) 104.04,39.46 D8.3@106.5,39.46
  Bottom Layer, Bottom w0.3: v1(60.35,41.75) 61.85,41.75 64.581,39.019 64.581,37.681 65.112,37.15 74.68,37.15 75.115,36.715 88.485,36.715 v1(89.03,36.17) 89.14,36.28 98.94,36.28 102.55,39.89 v1(103.61,39.89)
A3: D5.48 D7.9 D8.4 D9.4 | length 82.5
  Top Layer, Top w0.3: D5.48@64,51 64,51.45 64.7,52.15 v1(64.95,52.15) ; D7.9@96.588,34.9 97.49,34.9 97.53,34.86 97.63,34.86 98.44,34.86 98.54,34.86 v1(98.8,35.12) ; v1(100.44,56.98) 100.95,56.47 100.95,48.13 102.33,46.75 102.33,39.3 103.44,38.19 v1@104.29,38.19 ; v1(104.05,55.65) 104.05,54.78 104.04,54.77 105.37,53.44 D9.4@106.25,53.44 ; v1(104.29,38.32) v1@104.29,38.19 ; D8.4@106.5,38.19 v1@104.29,38.19
  Bottom Layer, Bottom w0.3: v1(64.95,52.15) 65.04,52.15 65.09,52.1 72.29,52.1 75.09,54.9 76.368,54.9 82.141,60.673 96.746,60.673 v1(100.44,56.98) 101.77,55.65 v1(104.05,55.65) ; v1(98.8,35.12) 101.87,38.19 104.29,38.19 v1(104.29,38.32)
A4: D5.47 D7.11 D8.5 D9.5 | length 82.1
  Top Layer, Top w0.3: D5.47@64,50.2 65.294,50.2 v1@66.159,51.065 ; v1(65.929,51.065) v1@66.159,51.065 ; v1@66.174,51.08 v1@66.159,51.065 ; D7.11@96.588,37.44 99.35,37.44 101.26,35.53 v1(101.26,35.23) ; v1(99.82,54.65) 100.31,54.16 100.31,47.91 101.72,46.5 101.72,39.05 103.92,36.85 v1(104.35,36.85) 104.42,36.92 D8.5@106.5,36.92 ; v1(104.04,53.13) 104.04,52.87 104.74,52.17 D9.5@106.25,52.17
  Bottom Layer, Bottom w0.3: v1(65.929,51.065) 72.115,51.065 75.25,54.2 76.703,54.2 82.497,59.994 94.416,59.994 98.54,55.87 98.54,55.81 v1@99.7,54.65 ; v1(101.26,35.23) 102.88,36.85 v1(104.35,36.85) ; v1(104.04,53.13) 101.22,53.13 v1@99.76,54.59 ; v1@99.7,54.65 v1(99.82,54.65) v1@99.76,54.59 ; v1@99.7,54.65 v1@99.76,54.59
A5: D5.46 D6.2 D6.5 D7.13 | length 70.6
  Top Layer, Top w0.3: D5.46@64,49.4 66.169,49.4 v1(66.691,49.922) ; D6.5@91.25,51.17 88.54,51.17 88.518,51.192 v1(88.027,51.192) 88.027,52.204 86.381,53.85 86.381,55.331 86.85,55.8 88.43,55.8 ; D6.2@91.25,54.98 89.55,54.98 88.73,55.8 88.43,55.8 ; D7.13@96.588,39.98 98.88,39.98 99.55,40.65 99.55,53.35 98.85,54.05 98.85,56.2 96.525,58.525 89.875,58.525 88.43,57.08 88.43,55.8
  Bottom Layer, Bottom w0.3: v1(66.691,49.922) 66.849,50.08 84.47,50.08 85.582,51.192 v1(88.027,51.192)
AE0: D7.2 X3.11 | length 45.5
  Top Layer, Top w0.3: X3.11@81.804,7.885 81.804,11.975 84.215,14.385 88.685,14.385 93.1,18.8 93.1,24.66 87.26,30.5 87.26,39.23 88.235,40.205 89.505,40.205 89.73,39.98 D7.2@91.25,39.98
AE1: D7.4 X3.12 | length 85.1
  Top Layer, Top w0.3: v1(84.852,13.346) 88.546,13.346 93.75,18.55 93.75,25 88.05,30.7 88.05,36.74 88.75,37.44 D7.4@91.25,37.44
  Bottom Layer, Bottom w0.3: X3.12@81.804,5.345 85.299,1.85 100.75,1.85 103.05,4.15 103.05,11.55 101.762,12.838 85.36,12.838 v1(84.852,13.346)
AE2: D7.6 X3.13 | length 34.8
  Top Layer, Top w0.3: X3.13@84.344,7.885 94.5,18.041 94.5,25.41 89.41,30.5 89.41,34.31 90,34.9 D7.6@91.25,34.9
AE3: D7.8 X3.14 | length 54.6
  Top Layer, Top w0.3: D7.8@96.588,33.63 96.588,33.012 101.95,27.65 101.95,14.55 99.35,11.95 99.35,11.05 100.25,10.15 v1(101.65,10.15)
  Bottom Layer, Bottom w0.3: X3.14@84.344,5.345 87.139,2.55 100.55,2.55 102.35,4.35 102.35,9.45 v1(101.65,10.15)
AE4: D7.10 X3.15 | length 85.3
  Top Layer, Top w0.3: v1(66.55,31.55) 67.39,30.71 67.39,25.79 66.59,24.99 65.02,24.99 64.77,24.74 64.77,16.33 v1(67.45,13.65) ; D7.10@96.588,36.17 97.64,36.17 97.64,36.28 99.35,36.28 99.96,35.67 v1(99.96,31.58)
  Bottom Layer, Bottom w0.3: v1(66.55,31.55) v1(99.96,31.58) ; v1(67.45,13.65) 68.008,13.092 77.404,13.092 79.563,10.933 85.36,10.933 86.884,9.409 X3.15@86.884,7.885
AE5: D7.12 X3.16 | length 56.2
  Top Layer, Top w0.3: D7.12@96.588,38.71 99.6,38.71 102.75,35.56 102.75,13.972 v1(100.346,11.568)
  Bottom Layer, Bottom w0.3: X3.16@86.884,5.345 88.979,3.25 100.35,3.25 101.65,4.55 101.65,8.65 100.346,9.954 v1(100.346,11.568)
ANS: D4.8 D5.31 | length 36
  Top Layer, Top w0.3: v1(58.55,44.68) 58.55,40.99 61.2,38.34 D5.31@61.2,36.9 ; D4.8@81.338,48.38 81.34,48.38 v1(81.34,46.86)
  Bottom Layer, Bottom w0.3: v1(58.55,44.68) 58.55,45.39 60.669,47.509 67.453,47.509 68.594,48.65 79.55,48.65 v1(81.34,46.86)
ANSE: R6.2 X3.20 | length 75.1
  Top Layer, Top w0.3: v1(80.915,13.346) 82.759,15.19 88.59,15.19 92.45,19.05 92.45,24.4 86.65,30.2 86.65,41.614 R6.2@87.036,42
  Bottom Layer, Bottom w0.3: v1(80.915,13.346) 82.058,12.203 97.197,12.203 100.95,8.45 100.95,4.75 100.15,3.95 93.359,3.95 X3.20@91.964,5.345
D0: D3.1 D5.35 D10.18 D11.18 D13.2 D14.2 D15.2 D16.2 D17.2 D18.2 D19.2 D20.2 | length 314.5
  Top Layer, Top w0.3: D5.35@64,40.6 65.54,40.6 67.648,38.492 70.022,38.492 72.36,40.83 v1(73.79,40.83) 73.96,41 D3.1@76,41 ; D11.18@139.088,41.96 v1@141.35,41.95 ; D10.18@139.088,59.21 136.91,59.21 136.05,58.35 136.05,48.35 137.87,46.53 142.46,46.53 143.1,45.89 143.1,42.55 142.5,41.95 v1@141.35,41.95 ; v1(141.25,42.05) 141.25,42.07 141.36,41.96 v1@141.35,41.95 ; D20.2@195,43.23 193.144,43.23 v1(192.802,43.572) 192.929,43.699 192.929,50.303 190.77,52.462 v1(190.77,60.082) 191.024,60.082 191.659,60.717 D18.2@195,60.73 ; v1(209.08,60.73) D14.2@212.5,60.73 ; v1(210.29,43.67) 210.73,43.23 D16.2@212.5,43.23 ; v1(226.58,60.73) D17.2@230,60.73 ; v1(227.79,43.67) 228.23,43.23 D19.2@230,43.23 ; v1(244.08,60.73) D13.2@247.5,60.73 ; v1(245.29,43.67) 245.73,43.23 D15.2@247.5,43.23
  Bottom Layer, Bottom w0.3: v1(73.79,40.83) 76.68,37.94 98.64,37.94 102.36,41.66 109.84,41.66 110.98,42.8 133.75,42.8 134.5,42.05 v1(141.25,42.05) 141.355,42.05 142.75,43.445 192.675,43.445 v1(192.802,43.572) 192.9,43.67 v1(210.29,43.67) v1(227.79,43.67) v1(245.29,43.67) ; v1(190.77,60.082) 191.278,60.59 192.421,60.59 203.11,60.62 203.565,60.165 208.515,60.165 v1(209.08,60.73) v1(226.58,60.73) v1(244.08,60.73)
D1: D3.3 D5.36 D10.16 D11.16 D13.3 D14.3 D15.3 D16.3 D17.3 D18.3 D19.3 D20.3 | length 304.8
  Top Layer, Top w0.3: D5.36@64,41.4 66.323,41.4 v1(67.072,40.651) ; v1(72.5,38.47) 73.66,38.47 73.67,38.46 D3.3@76,38.46 ; D11.16@139.088,39.42 140.6,39.42 141.3,40.12 v1(141.3,40.62) ; D10.16@139.088,56.67 144.75,56.67 146.53,54.89 146.53,42.7 146.55,42.68 v1(146.55,42.15) ; v1(189.754,59.193) 189.754,52.589 191.786,50.557 191.786,42.964 v1(192.79,41.96) D20.3@195,41.96 ; v1(192.79,59.46) D18.3@195,59.46 ; v1(210.29,41.96) D16.3@212.5,41.96 ; v1(210.29,59.46) D14.3@212.5,59.46 ; v1(227.79,41.96) D19.3@230,41.96 ; v1(227.79,59.46) D17.3@230,59.46 ; v1(245.29,41.96) D15.3@247.5,41.96 ; v1(245.29,59.46) D13.3@247.5,59.46
  Bottom Layer, Bottom w0.3: v1(67.072,40.651) 70.319,40.651 v1(72.5,38.47) 73.01,37.96 75.72,37.96 76.35,37.33 98.89,37.33 102.61,41.05 109.91,41.05 110.34,40.62 v1(141.3,40.62) 142.02,40.62 143.55,42.15 v1(146.55,42.15) 192.6,42.15 v1(192.79,41.96) v1(210.29,41.96) v1(227.79,41.96) v1(245.29,41.96) ; v1(189.754,59.193) 189.881,59.066 191.392,59.066 191.786,59.46 v1(192.79,59.46) v1(210.29,59.46) v1(227.79,59.46) v1(245.29,59.46)
D2: D3.5 D5.37 D10.14 D11.14 D13.4 D14.4 D15.4 D16.4 D17.4 D18.4 D19.4 D20.4 | length 331.8
  Top Layer, Top w0.3: v1(63.389,37.476) v1@63.424,37.476 ; v1@63.59,37.31 v1@63.424,37.476 ; D5.37@64,42.2 63.03,42.2 62.25,41.42 62.25,38.65 v1@63.424,37.476 ; v1(73.77,36.15) 74,35.92 D3.5@76,35.92 ; D11.14@139.088,36.88 140.85,36.88 142.05,38.08 v1(142.05,38.15) ; D10.14@139.088,54.13 137.13,54.13 136.75,53.75 136.75,48.95 137.819,47.881 143.281,47.881 144.07,47.092 144.07,40.17 v1(142.05,38.15) ; v1@142.06,38.25 142.05,38.24 v1(142.05,38.15) ; v1(184.35,36.05) 184.35,39.311 v1(185.817,40.778) ; v1(188.738,58.177) 188.738,52.589 191.151,50.176 191.151,41.54 v1(192.04,40.651) 194.741,40.651 194.868,40.778 194.89,40.8 D20.4@195,40.69 ; v1(191.961,58.19) D18.4@195,58.19 ; v1(209.08,40.69) D16.4@212.5,40.69 ; v1(209.08,58.19) D14.4@212.5,58.19 ; v1(226.58,40.69) D19.4@230,40.69 ; v1(226.58,58.19) D17.4@230,58.19 ; v1(244.08,40.69) D15.4@247.5,40.69 247.44,40.75 v1@244.25,40.75 ; v1(244.08,58.19) D13.4@247.5,58.19
  Bottom Layer, Bottom w0.3: v1(63.389,37.476) 63.389,37.081 64.32,36.15 v1(73.77,36.15) 74.05,35.87 87.09,35.87 87.95,35.01 97.26,35.01 98.135,34.135 101.825,34.135 102.4,34.71 110.153,34.71 114.493,39.05 139.182,39.05 140.082,38.15 v1(142.05,38.15) 168.128,38.15 170.196,36.082 184.35,36.082 v1(184.35,36.05) ; v1(185.817,40.778) 191.489,40.778 191.701,40.99 v1(192.04,40.651) 208.821,40.651 208.948,40.778 208.97,40.8 v1(209.08,40.69) v1(226.58,40.69) v1(244.08,40.69) ; v1(188.738,58.177) 191.948,58.177 v1(191.961,58.19) v1(209.08,58.19) v1(226.58,58.19) v1(244.08,58.19)
D3: D3.9 D5.38 D10.12 D11.12 D13.5 D14.5 D15.5 D16.5 D17.5 D18.5 D19.5 D20.5 | length 325.6
  Top Layer, Top w0.3: v1(61.05,40.15) 61.05,41.08 62.85,42.88 64,42.88 D5.38@64,43 ; D3.9@81.338,34.65 82.23,34.65 83.97,32.91 v1(84.01,32.91) ; D11.12@139.088,34.34 141.201,34.34 v1(144.161,31.38) ; D10.12@139.088,51.59 143.13,51.59 145.15,49.57 v1(145.15,41.05) 145.15,32.369 v1(144.161,31.38) ; v1@144.034,31.253 v1(144.161,31.38) ; v1(187.595,56.907) 187.595,52.843 190.516,49.922 190.516,40.778 191.874,39.42 v1(192.79,39.42) D20.5@195,39.42 ; v1(192.79,56.92) D18.5@195,56.92 ; v1(210.29,39.42) D16.5@212.5,39.42 ; v1(210.29,56.92) D14.5@212.5,56.92 ; v1(227.79,39.42) D19.5@230,39.42 ; v1(227.79,56.92) D17.5@230,56.92 ; v1(245.29,39.42) D15.5@247.5,39.42 ; v1(245.29,56.92) D13.5@247.5,56.92
  Bottom Layer, Bottom w0.3: v1(61.05,40.15) 61.05,37.75 63.92,34.88 82.04,34.88 v1(84.01,32.91) 84.18,32.74 102.21,32.74 103.76,31.19 143.971,31.19 v1(144.161,31.38) ; v1(145.15,41.05) 144.905,41.05 144.796,41.159 184.039,41.159 185.778,39.42 v1(192.79,39.42) v1(210.29,39.42) v1(227.79,39.42) v1(245.29,39.42) ; v1(187.595,56.907) 192.777,56.907 v1(192.79,56.92) v1(210.29,56.92) v1(227.79,56.92) v1(245.29,56.92)
D4: D3.11 D5.39 D10.9 D11.9 D13.6 D14.6 D15.6 D16.6 D17.6 D18.6 D19.6 D20.6 | length 359
  Top Layer, Top w0.3: D5.39@64,43.8 65.421,43.8 65.649,43.572 v1(66.056,43.572) ; D3.11@81.338,37.19 85.45,37.19 85.49,37.15 ; v1(81.57,42.82) 82.28,42.82 83.53,41.57 83.53,41.03 83.85,40.65 84.05,40.65 85.49,39.21 85.49,37.15 ; v1(85.49,34.71) 85.49,37.15 ; v1(127.58,50.39) 127.58,50.89 128.28,51.59 D10.9@130,51.59 ; v1(127.79,33.57) 127.79,33.787 128.342,34.34 D11.9@130,34.34 ; v1(186.579,55.764) 186.579,52.97 189.906,49.643 189.906,40.245 v1(192.04,38.111) 194.961,38.111 D20.6@195,38.15 ; v1(191.961,55.65) D18.6@195,55.65 ; v1(209.08,38.15) D16.6@212.5,38.15 ; v1(209.08,55.65) D14.6@212.5,55.65 ; v1(226.58,38.15) D19.6@230,38.15 ; v1(226.58,55.65) D17.6@230,55.65 ; v1(244.08,38.15) D15.6@247.5,38.15 ; v1(244.08,55.65) D13.6@247.5,55.65
  Bottom Layer, Bottom w0.3: v1(66.056,43.572) 67.254,44.77 69.485,44.77 70.302,43.953 81.567,43.953 81.57,43.95 ; v1(81.57,42.82) 81.57,43.95 ; v1(85.49,34.71) 85.49,34.34 97.07,34.34 97.905,33.505 102.705,33.505 104.11,32.1 113.766,32.1 115.506,33.84 119.73,33.84 120.23,34.34 127.79,34.34 ; v1(127.58,50.39) 125.39,48.2 116.73,48.2 113.65,45.12 106.99,45.12 105.81,46.3 103.56,46.3 101.21,43.95 81.57,43.95 ; v1(127.79,33.57) 127.79,34.34 ; v1(186.579,55.764) 191.847,55.764 v1(191.961,55.65) v1(209.08,55.65) v1(226.58,55.65) v1(244.08,55.65) ; v1(244.08,38.15) v1(226.58,38.15) v1(209.08,38.15) 209.041,38.111 v1(192.04,38.111) 192.04,37.984 185.69,31.634 167.281,31.634 164.575,34.34 127.79,34.34
D5: D3.13 D5.40 D10.7 D11.7 D13.7 D14.7 D15.7 D16.7 D17.7 D18.7 D19.7 D20.7 | length 323.8
  Top Layer, Top w0.3: D5.40@64,44.6 67.57,44.6 68.342,43.828 v1(68.342,43.064) ; D3.13@81.338,39.73 83.57,39.73 v1(83.65,39.65) ; v1(125.47,32.57) 123.06,34.98 123.06,37.65 ; D11.7@130,36.88 127.32,36.88 126.65,37.55 123.16,37.55 123.06,37.65 ; D10.7@130,54.13 125.25,54.13 122.22,51.1 122.22,44.8 v1(123.06,43.96) 123.06,37.65 ; v1(185.563,54.367) 185.563,53.097 189.07,49.59 189.07,39.508 191.698,36.88 v1(192.79,36.88) D20.7@195,36.88 ; v1(192.79,54.38) D18.7@195,54.38 ; v1(210.29,36.88) D16.7@212.5,36.88 ; v1(210.29,54.38) D14.7@212.5,54.38 ; v1(227.79,36.88) D19.7@230,36.88 ; v1(227.79,54.38) D17.7@230,54.38 ; v1(245.29,36.88) D15.7@247.5,36.88 ; v1(245.29,54.38) D13.7@247.5,54.38
  Bottom Layer, Bottom w0.3: v1(68.342,43.064) 68.806,42.6 78.41,42.6 81.36,39.65 v1(83.65,39.65) 84.26,40.26 99.24,40.26 102.96,43.98 123.04,43.98 v1(123.06,43.96) ; v1(125.47,32.57) 126.24,31.8 137.71,31.8 138.255,32.345 163.643,32.345 164.989,30.999 185.944,30.999 191.825,36.88 v1(192.79,36.88) v1(210.29,36.88) v1(227.79,36.88) v1(245.29,36.88) ; v1(185.563,54.367) 192.777,54.367 v1(192.79,54.38) v1(210.29,54.38) v1(227.79,54.38) v1(245.29,54.38)
D6: D4.1 D5.41 D10.5 D11.5 D13.8 D14.8 D15.8 D16.8 D17.8 D18.8 D19.8 D20.8 | length 321.9
  Top Layer, Top w0.3: D5.41@64,45.4 65.67,45.4 65.79,45.28 70.72,45.28 v1(71,45) ; v1(69.358,47.636) 69.358,50.811 68.554,51.615 68.554,55.044 69.51,56 D4.1@76,56 ; v1(124.15,49.35) 124.15,44.37 129.1,39.42 D11.5@130,39.42 ; D10.5@130,56.67 130.9,56.67 132.21,55.36 v1(132.21,53.11) ; v1(184.547,53.097) 188.357,49.287 188.357,38.873 191.659,35.571 v1(192.04,35.571) 194.961,35.571 D20.8@195,35.61 ; v1(191.961,53.11) D18.8@195,53.11 ; v1(209.08,35.61) D16.8@212.5,35.61 ; v1(209.08,53.11) D14.8@212.5,53.11 ; v1(226.58,35.61) D19.8@230,35.61 ; v1(226.58,53.11) D17.8@230,53.11 ; v1(244.08,35.61) D15.8@247.5,35.61 ; v1(244.08,53.11) D13.8@247.5,53.11
  Bottom Layer, Bottom w0.3: v1(69.358,47.636) 69.358,46.642 v1(71,45) 101.27,45 103.18,46.91 106.55,46.91 107.73,45.73 113.04,45.73 116.67,49.36 116.68,49.35 v1(124.15,49.35) 126.5,51.7 130.8,51.7 v1(132.21,53.11) 133.467,54.367 183.277,54.367 v1(184.547,53.097) 191.948,53.097 v1(191.961,53.11) v1(209.08,53.11) v1(226.58,53.11) v1(244.08,53.11) ; v1(192.04,35.571) 209.041,35.571 v1(209.08,35.61) v1(226.58,35.61) v1(244.08,35.61)